# Altium PCB PCB1.PcbDoc
Units mm, origin at the board's own origin, x right, y up, seen from the top; angles counter-clockwise.
Board outline 17.4 x 16.51 mm, 2 copper layers (Top Layer, Bottom Layer); 2 components, 8 nets, 16 pads, 8 vias.
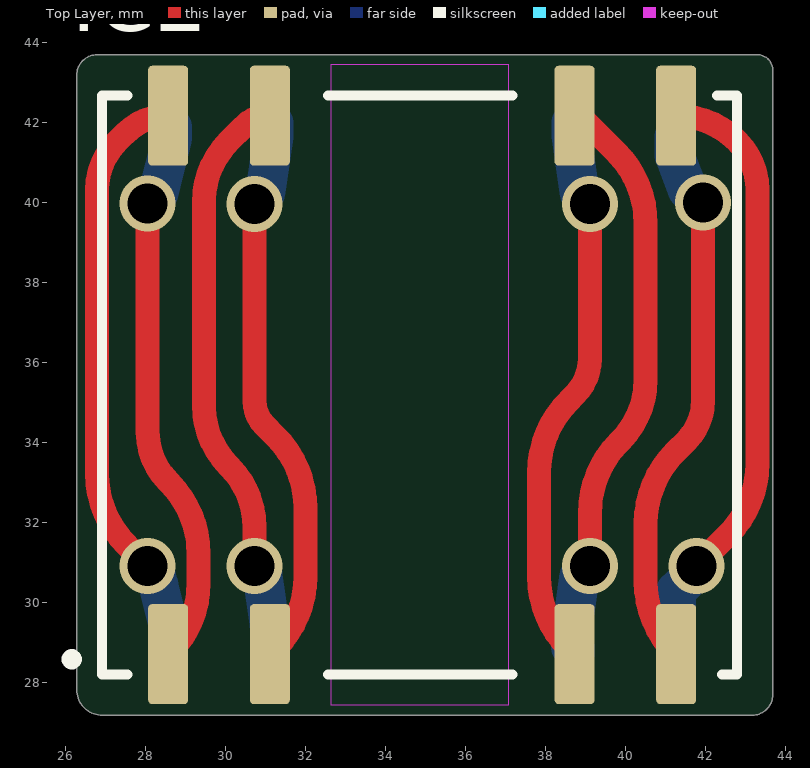
[diagram p0: Top Layer view]
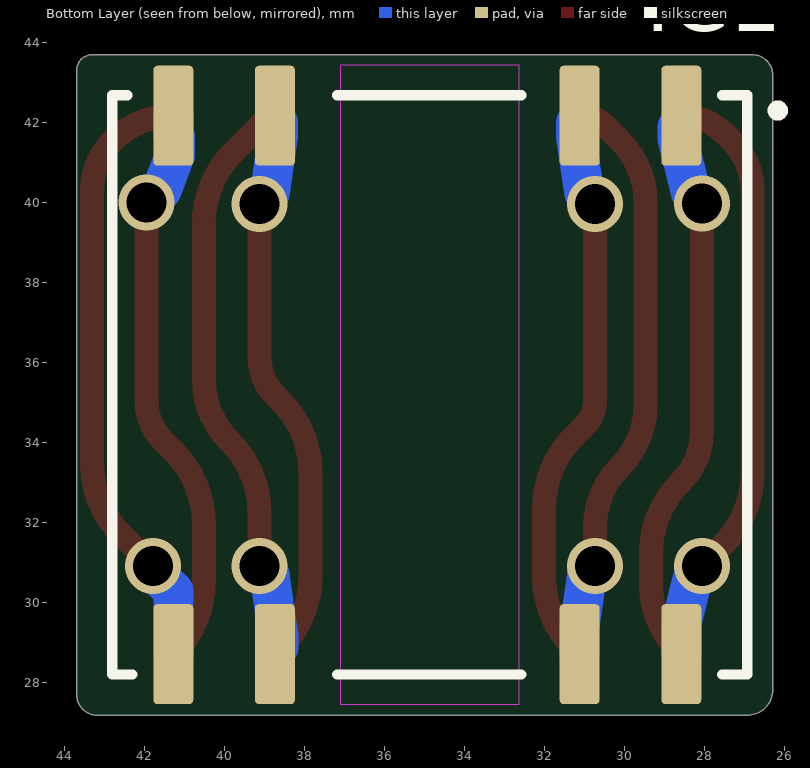
[diagram p1: Bottom Layer view, seen from below]

## Layer stack, top to bottom
Top Solder: solder mask 0.0102, Solder Resist, Dk 3.5
Top Layer: signal copper 0.0356
Dielectric 1: dielectric 0.32, FR-4, Dk 4.8
Bottom Layer: signal copper 0.0356
Bottom Solder: solder mask 0.0102, Solder Resist, Dk 3.5

## Board outline
26.924,27.178 cw(c26.924,27.813) 26.289,27.813 26.289,43.18 cw(c26.797,43.18) 26.797,43.688 43.307,43.688 cw(c43.307,43.307) 43.688,43.307 43.688,27.686 cw(c43.18,27.686) 43.18,27.178

## Design rules (kind name [scope] priority, off if disabled: settings)
Clearance [All] p1: gap=0.254 ignorepadtopadclearanceinfootprint=FALSE except(0: Arc-Hole Track-Hole SMDPad-Hole THPad-Hole Via-Hole Fill-Hole Poly-Hole Region-Hole Text-Hole)
PolygonConnect [All] p1: connectstyle=Relief reliefconductorwidth=0.254 reliefentries=4 polygonreliefangle="90 Angle" airgapwidth=0.254
RoutingVias [All] p1: holewidth=1 width=1.3 viastyle="Through Hole" minholewidth=0.711 minwidth=1.27 maxholewidth=2 maxwidth=3
SolderMaskExpansion [All] p1: expansion=0.102 istentingtop=FALSE
Width [All] p1: maxlimit=1 minlimit=0.254 preferedwidth=0.6
30 further rules are at their usual default settings.

## Components (designator, comment, footprint, x,y, rotation, side; value= is the part's Value field where it differs from the comment)
IC1 "NXJ2S2415MC-R7" DCDC 28.575,28.704 r0 bottom value="2 W"
IC2 "NXJ2S2415MC-R7" DCDC 28.575,42.164 r0 top value="2 W"

## Footprints (in the part's own frame and the unit in brackets; to place one, negate y for a bottom-side part, rotate by r counter-clockwise, add the part's x,y. Pads: shape width x height; smd on the part's side, far side on the other; paste and mask are expansions set on the pad)
DCDC [mm]
  rrect20% 1x2.5 smd: 1(0,-13.46) 2(2.54,-13.46) 5(10.16,-13.46) 6(12.7,-13.46) 7(12.7,0) 8(10.16,0) 11(2.54,0) 12(0,0)
  Keep-Out Layer region: 4.064,1.27 8.509,1.27 8.509,-14.732 4.064,-14.732
  silkscreen extent -2.54,-13.97 14.22,0.51, body extent -1.65,-13.9 14.35,0.58, height 4.23

## Part data
IC1 IC2: "Isolated DC/DC Converters - SMD 21.6V TO 26.4V IN 15V OUT", Device Package=-, Manufacturer=Murata, Operating Temperature="-40 - 85 °C", Supplier Part Number 1=580-NXJ2S2415MC-R7, Component Type="DC-DC Converter", ComponentLink1Description=Datasheet, ComponentLink1URL=https://www.mouser.de/datasheet/2/281/1/kdc_nxj2-2941192.pdf, Created from=VStarost, Created On="13.12.2022 13:30:59", Last Updated="13.12.2022 13:30:59", Live Cycle Status=1, Manufacturer Part Number=NXJ2S2415MC-R7, Mounting Type=SMD, PartID=25, Series=NXJ2, Stock number="not stored", Supplier 1=Mouser, Type="isolated DC-DC Converter"

## Via types
v1: diameter 1.4, hole 1, Top Layer to Bottom Layer, 8 vias

## Nets (pads, with @x,y where several pads share a name; then routed paths per layer and width w, separated by ;. In a path a pad name is that pad's centre, name@x,y a point inside that pad or via, vN(x,y) a via of type N, cw(c..) or ccw(c..) an arc to the next point about the centre after c; other vN are vias at no path point)
NetIC1_1: IC1.1 IC2.1 | length 14.3
  Top Layer w0.6: v1(28.063,39.966) 28.063,34.257 ccw(c29.812,34.257) 28.575,33.02 28.593,33.002 cw(c26.797,31.206) 29.337,31.206 29.337,30.48 cw(c26.889,30.48) 28.62,28.749 IC2.1
  Bottom Layer w1: v1(28.063,39.966) 28.079,39.976 28.134,40.031 28.33,40.227 28.397,40.493 ccw(c27.427,40.738) 28.398,40.497 28.675,41.605 28.675,41.882 28.575,41.882 IC1.1
NetIC1_2: IC1.2 IC2.2 | length 14.3
  Top Layer w0.6: v1(30.734,39.96) 30.734,35.03 ccw(c31.601,35.03) 30.988,34.417 31.26,34.145 cw(c29.464,32.349) 32.004,32.349 32.004,30.645 cw(c29.464,30.645) 31.26,28.849 IC2.2
  Bottom Layer w1: v1(30.734,39.96) 30.739,39.964 30.764,39.988 30.999,40.224 31.046,40.553 31.208,41.672 31.208,41.98 31.115,41.98 IC1.2
NetIC1_5: IC1.5 IC2.5 | length 14.3
  Top Layer w0.6: IC2.5 38.59,28.849 cw(c40.386,30.645) 37.846,30.645 37.846,33.238 cw(c40.386,33.238) 38.59,35.034 38.735,35.179 ccw(c37.815,36.099) 39.116,36.099 v1(39.116,39.96)
  Bottom Layer w1: IC1.5 38.735,41.995 38.652,41.995 38.652,41.765 38.652,41.693 38.866,40.21 39.101,39.974 39.115,39.961 v1(39.116,39.96)
NetIC1_6: IC1.6 IC2.6 | length 14.4
  Top Layer w0.6: IC2.6 41.257,28.722 cw(c43.053,30.518) 40.513,30.518 40.513,31.968 cw(c43.053,31.968) 41.257,33.764 41.529,34.036 ccw(c40.521,35.044) 41.946,35.044 v1(41.946,39.996)
  Bottom Layer w1: IC1.6 41.275,41.65 41.232,41.65 41.232,41.36 41.232,41.173 41.562,40.319 41.712,40.17 41.838,40.043 v1(41.946,39.996)
NetIC1_7: IC1.7 IC2.7 | length 15.3
  Top Layer w0.6: IC2.7 cw(c41.275,40.018) 42.793,41.535 42.799,41.529 cw(c41.573,40.303) 43.307,40.303 43.307,33.474 cw(c40.767,33.474) 42.563,31.678 v1(41.787,30.902)
  Bottom Layer w1: IC1.7 41.275,30.281 41.787,30.794 v1@41.787,30.846
NetIC1_8: IC1.8 IC2.8 | length 14.7
  Top Layer w0.6: IC2.8 cw(c38.735,41.857) 38.952,42.074 39.769,41.257 cw(c37.973,39.461) 40.513,39.461 40.513,35.569 cw(c38.345,35.569) 39.878,34.036 39.86,34.018 ccw(c41.656,32.222) 39.116,32.222 v1(39.116,30.908)
  Bottom Layer w1: IC1.8 38.735,28.88 38.647,28.88 38.647,29.114 38.647,29.186 38.859,30.651 39.094,30.886 39.113,30.906 v1(39.116,30.908)
NetIC1_11: IC1.11 IC2.11 | length 14.7
  Top Layer w0.6: v1(30.734,30.908) 30.734,31.868 ccw(c28.566,31.868) 30.099,33.401 cw(c31.632,34.934) 29.464,34.934 29.464,39.996 cw(c31.632,39.996) 30.099,41.529 30.465,41.895 cw(c31.115,41.244) IC2.11
  Bottom Layer w1: v1(30.734,30.908) 30.745,30.899 30.927,30.718 31.113,29.426 31.115,29.426 IC1.11
NetIC1_12: IC1.12 IC2.12 | length 15
  Top Layer w0.6: v1(28.063,30.902) 27.541,31.424 cw(c29.337,33.22) 26.797,33.22 26.797,40.303 cw(c28.531,40.303) 27.305,41.529 27.491,41.715 cw(c28.575,40.631) IC2.12
  Bottom Layer w1: v1(28.063,30.902) 28.064,30.901 28.261,30.704 28.328,30.435 28.575,29.449 IC1.12

## Polygon pours and split planes (outlines as drawn)
no net on Bottom Solder "NONET_L-01_P-001" (solid): 28.067,42.291 ccw(c28.374,41.984) 27.94,41.984 27.94,41.253 cw(c27.073,41.253) 27.686,40.64 ccw(c28.299,40.027) 27.432,40.027 ccw(c28.098,40.027) 27.627,39.556 ccw(c28.076,40.005) 28.076,39.37 ccw(c28.076,39.961) 28.494,39.543 28.581,39.63 ccw(c27.064,41.148) 29.21,41.148 29.21,41.984 ccw(c28.776,41.984) 29.083,42.291
no net on Bottom Solder "NONET_L-01_P-001" (solid): 30.607,42.164 ccw(c30.914,41.857) 30.48,41.857 30.48,40.947 cw(c30.046,40.947) 30.353,40.64 ccw(c30.966,40.027) 30.099,40.027 ccw(c30.458,40.027) 30.204,39.773 30.427,39.55 ccw(c30.861,39.983) 30.861,39.37 ccw(c30.861,39.677) 31.078,39.46 ccw(c29.455,41.083) 31.75,41.083 31.75,41.551 ccw(c30.883,41.551) 31.496,42.164
no net on Bottom Solder "NONET_L-01_P-001" (solid): 38.227,41.91 ccw(c38.534,41.603) 38.1,41.603 38.1,40.544 ccw(c39.401,40.544) 38.481,39.624 ccw(c39.094,40.237) 39.094,39.37 ccw(c39.094,40.036) 39.565,39.565 ccw(c39.116,40.014) 39.751,40.014 39.751,40.027 ccw(c38.884,40.027) 39.497,40.64 cw(c39.804,40.947) 39.37,40.947 39.37,41.476 ccw(c38.936,41.476) 39.243,41.783
no net on Bottom Solder "NONET_L-01_P-001" (solid): 40.894,42.164 40.82,42.09 ccw(c41.253,41.656) 40.64,41.656 40.64,41.157 ccw(c42.808,41.157) 41.275,39.624 ccw(c41.888,40.237) 41.888,39.37 ccw(c41.888,40.036) 42.359,39.565 ccw(c41.91,40.014) 42.545,40.014 42.545,40.154 ccw(c41.678,40.154) 42.291,40.767 42.09,40.968 cw(c42.523,41.402) 41.91,41.402 41.91,41.73 ccw(c41.476,41.73) 41.783,42.037
no net on Bottom Solder "NONET_L-01_P-001" (solid): 40.894,28.956 40.82,29.03 cw(c41.253,29.464) 40.64,29.464 40.64,29.963 cw(c42.808,29.963) 41.275,31.496 cw(c41.582,31.189) 41.582,31.623 41.91,31.623 cw(c41.91,31.316) 42.127,31.533 42.418,31.242 cw(c42.111,30.935) 42.545,30.935 42.545,30.66 cw(c42.111,30.66) 42.418,30.353 42,29.935 ccw(c42.217,29.718) 41.91,29.718 41.91,29.263 cw(c41.476,29.263) 41.783,28.956
no net on Bottom Solder "NONET_L-01_P-001" (solid): 38.1,30.27 cw(c39.834,30.27) 38.608,31.496 cw(c38.915,31.189) 38.915,31.623 39.243,31.623 cw(c39.243,31.316) 39.46,31.533 39.878,31.115 39.878,30.66 cw(c39.444,30.66) 39.751,30.353 39.55,30.152 ccw(c39.983,29.718) 39.37,29.718 39.37,29.39 cw(c38.936,29.39) 39.243,29.083 38.354,29.083 cw(c38.354,29.39) 38.137,29.173 38.1,29.21
no net on Bottom Solder "NONET_L-01_P-001" (solid): 30.48,28.956 ccw(c30.607,28.956) 30.607,28.829 31.623,28.829 ccw(c31.623,28.956) 31.75,28.956 31.75,30.449 ccw(c30.449,30.449) 31.369,31.369 ccw(c30.756,30.756) 30.756,31.623 30.607,31.623 ccw(c30.607,31.01) 30.173,31.443 30.099,31.369 ccw(c30.406,31.062) 29.972,31.062 29.972,30.66 ccw(c30.406,30.66) 30.099,30.353 30.39,30.062 cw(c30.173,29.845) 30.48,29.845
no net on Bottom Solder "NONET_L-01_P-001" (solid): 27.94,28.956 27.94,29.306 ccw(c26.639,29.306) 27.559,30.226 cw(c28.172,30.839) 27.305,30.839 27.305,30.988 cw(c27.612,30.988) 27.395,31.205 27.686,31.496 cw(c27.993,31.189) 27.993,31.623 28.194,31.623 cw(c28.194,31.01) 28.628,31.443 28.829,31.242 cw(c27.909,30.322) 29.21,30.322 29.21,28.956 cw(c29.083,28.956) 29.083,28.829 28.067,28.829 cw(c28.067,28.956)

## Silkscreen, mask and mechanical layers (free items; w line width, h text height)
Mechanical 1:
  the board outline again, w0.5